# Altium PCB OLED.PcbDoc
Units mil, origin at the board's own origin, x right, y up, seen from the top; angles counter-clockwise.
Board outline 1061 x 1023 mil, 2 copper layers (Top Layer, Bottom Layer); 19 components, 14 nets, 71 pads, 11 vias.
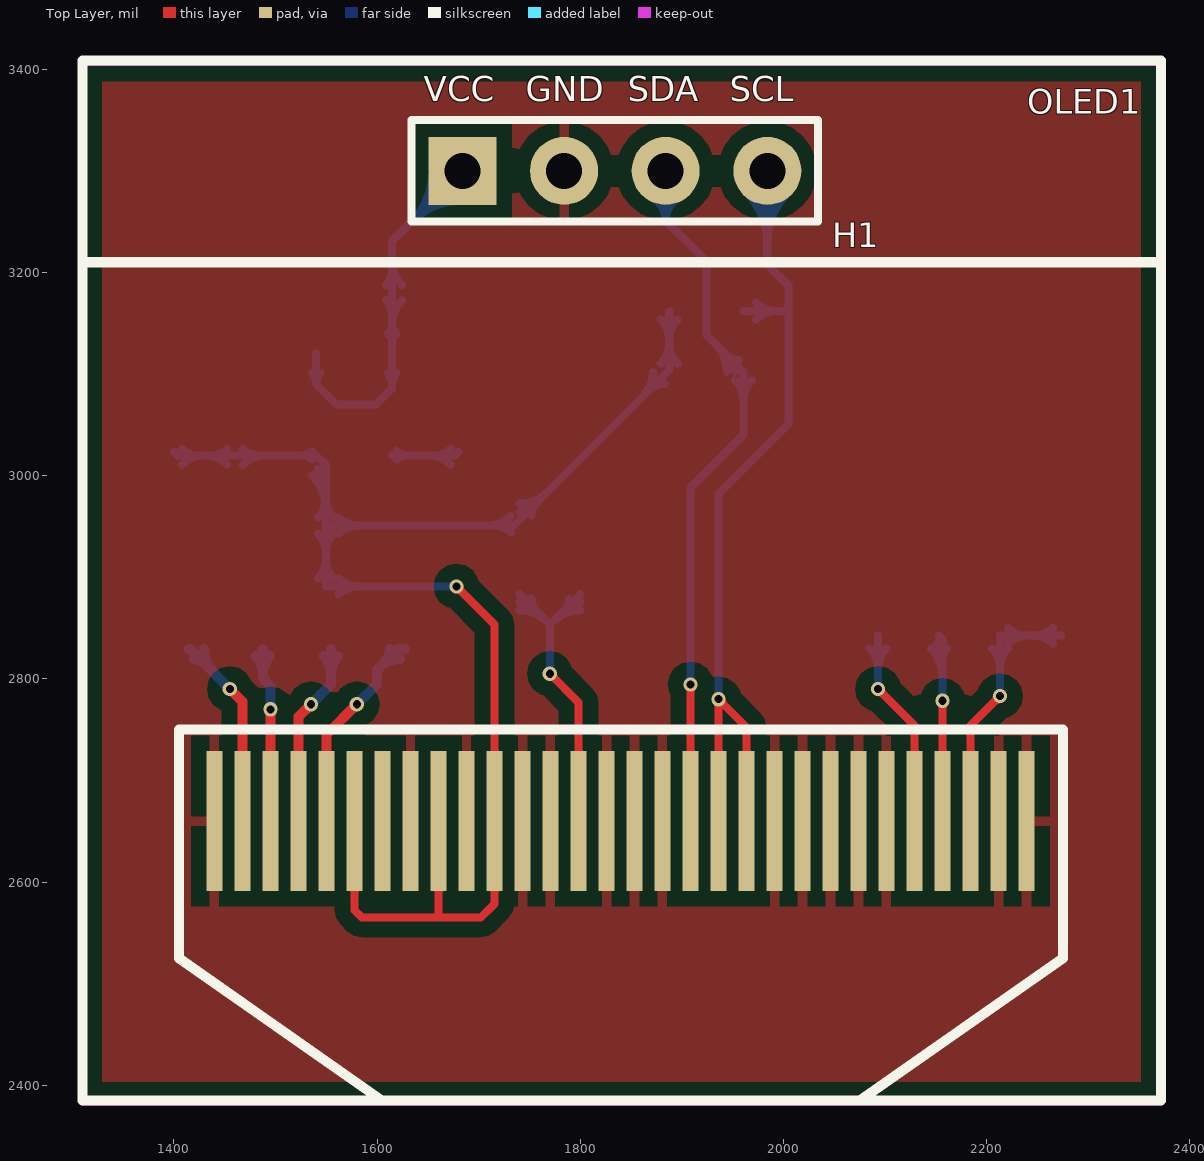
[diagram p0: Top Layer view]
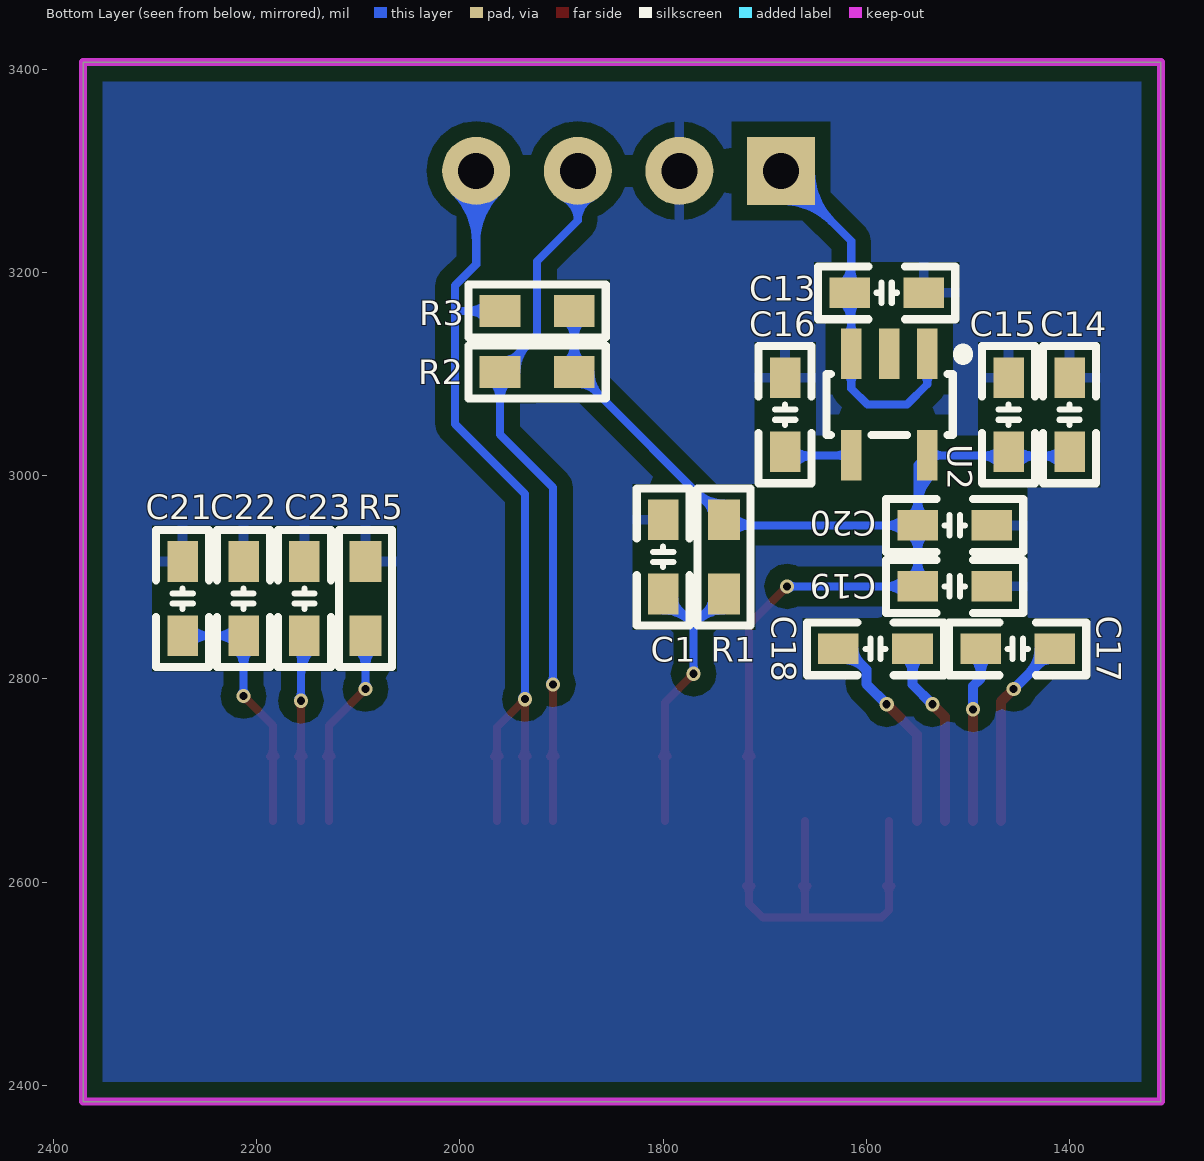
[diagram p1: Bottom Layer view, seen from below]

## Layer stack, top to bottom
Top Layer: signal copper 1.4
Dielectric: dielectric 12.6, FR-4, Dk 4.8
Bottom Layer: signal copper 1.4

## Board outline
1310,2384 1310,3407 2371,3407 2371,2384

## Design rules (kind name [scope] priority, off if disabled: settings)
Clearance [All] p1: gap=6
ComponentClearance [All] p1 off: gap=10 collisioncheckmode=3 verticalgap=10 showdistances=FALSE
HoleToHoleClearance [All] p1: gap=0 allowstackedmicrovias=TRUE
MinimumSolderMaskSliver [All] p1: minsoldermaskwidth=0
PolygonConnect [All] p1: connectstyle=Relief reliefconductorwidth=10 reliefentries=4 polygonreliefangle="90 Angle"
RoutingVias [All] p1: holewidth=8 width=14 viastyle="Through Hole" minholewidth=8 minwidth=14 maxholewidth=208 maxwidth=214
SilkToSilkClearance [All] p1: silktosilkclearance=0
SilkscreenOverComponentPads [All] p1: minsilkscreentomaskgap=0
SolderMaskExpansion [All] p1: expansion=4
TestPointUsage [All] p1: valid=0 allowmultiple=FALSE
Testpoint [All] p1: side=3 testpointundercomponent=TRUE minsize=40 maxsize=100 preferedsize=60 minholesize=0 maxholesize=40 preferedholesize=32 testpointgrid=1 style=297 order=0-112345678
Width [All] p1: maxlimit=200 minlimit=6 preferedwidth=10 toplayer_prefwidth=8 bottomlayer_prefwidth=8 minimp=50.000000 maximp=50.000000 favimp=50.000000
19 further rules are at their usual default settings.

## Components (designator, comment, footprint, x,y, rotation, side; value= is the part's Value field where it differs from the comment)
C1 "4.7uF" "C 0603_M" 1800,2920 r90 bottom
C13 "10uF" "C 0603_M" 1580,3180 r180 bottom
C14 "104" "C 0603_M" 1400,3060 r270 bottom
C15 "10uF" "C 0603_M" 1460,3060 r270 bottom
C16 "103" "C 0603_M" 1680,3060 r270 bottom
C17 "1uF" "C 0603_M" 1451,2829.5 r180 bottom
C18 "1uF" "C 0603_M" 1591,2829.5 r180 bottom
C19 "10uF" "C 0603_M" 1513,2891 r0 bottom
C20 "104" "C 0603_M" 1513,2951 r0 bottom
C21 "10uF" "C 0603_M" 2273,2879 r270 bottom
C22 "104" "C 0603_M" 2213,2879 r270 bottom
C23 "10uF" "C 0603_M" 2153,2879 r270 bottom
H1 "Header 4" HDR2.54-LI-4P 1834,3300 r0 top
OLED1 "OLED12864" OLED_0.96 1440,2660 r0 top locked
R1 "4.7K" "R 0603_M" 1740,2920 r90 bottom
R2 "4.7K" "R 0603_M" 1924,3102 r0 bottom
R3 "4.7K" "R 0603_M" 1924,3162 r0 bottom
R5 "760K" "R 0603_M" 2093,2879 r270 bottom
U2 "CAT6219-330TD" SOT-23-5 1540,3120 r270 bottom

## Footprints (in the part's own frame and the unit in brackets; to place one, negate y for a bottom-side part, rotate by r counter-clockwise, add the part's x,y. Pads: shape width x height; smd on the part's side, far side on the other; paste and mask are expansions set on the pad)
"C 0603_M" [mil] "无极性贴片电容"
  rect 40x30 smd: 1(-36.5,0) 2(36.5,0)
  silkscreen extent -68,-26 68,26, body extent -31,-16 31,16, height 32
HDR2.54-LI-4P [mm] "排针，4脚"
  rect 1.7x1.7 hole 0.9: 1(-3.81,0)
  round 1.7 hole 0.9: 2(-1.27,0) 3(1.27,0) 4(3.81,0)
  silkscreen extent -5.08,-1.27 5.08,1.27, body extent -5.08,-1.27 5.08,1.27, height 8.5
OLED_0.96 [mm]
  rect 0.4x3.5 smd: 1(0,0) 2(0.7,0) 3(1.4,0) 4(2.1,0) 5(2.8,0) 6(3.5,0) 7(4.2,0) 8(4.9,0) 9(5.6,0) 10(6.3,0) 11(7,0) 12(7.7,0) 13(8.4,0) 14(9.1,0) 15(9.8,0) 16(10.5,0) 17(11.2,0) 18(11.9,0) 19(12.6,0) 20(13.3,0) 21(14,0) 22(14.7,0) 23(15.4,0) 24(16.1,0) 25(16.8,0) 26(17.5,0) 27(18.2,0) 28(18.9,0) 29(19.6,0) 30(20.3,0)
  silkscreen extent -3.3,-6.98 23.66,19.01
"R 0603_M" [mil] "1/10W贴片电阻"
  rect 40x31.5 smd: 1(-36.5,0) 2(36.5,0)
  silkscreen extent -68,-26 68,26, body extent -31,-16 32,16, height 16
SOT-23-5 [mil]
  rect 50x20 smd: 1(0,0) 2(0,-37.4) 3(0,-74.8) 4(100,-74.8) 5(100,0)
  silkscreen extent 0,-99 80,35

## Part data
C1 C13 C14 C15 C16 C17 C18 C19 C20 C21 C22 C23: library part C
H1: "Header, 4-Pin"
R1 R2 R3 R5: library part R
U2: "3.3V 500mA LDO"

## Via types
v1: diameter 14, hole 8, Top Layer to Bottom Layer, 11 vias

## Nets (pads, with @x,y where several pads share a name; then routed paths per layer and width w, separated by ;. In a path a pad name is that pad's centre, name@x,y a point inside that pad or via, vN(x,y) a via of type N, cw(c..) or ccw(c..) an arc to the next point about the centre after c; other vN are vias at no path point)
GND: C1.2 C13.2 C14.1 C15.1 C16.1 C19.1 C20.1 C21.1 C22.1 C23.1 H1.2 OLED1.1 OLED1.8 OLED1.10 OLED1.12 OLED1.13 OLED1.15 OLED1.16 OLED1.17 OLED1.21 OLED1.22 OLED1.23 OLED1.24 OLED1.25 OLED1.29 OLED1.30 R5.1 U2.2
IIC_SCL: H1.3 OLED1.18 R2.2 | length 999.6
  Top Layer w8: OLED1.18@1905.76,2723.76 ccw(c1899.15,2730.38) 1908.5,2730.38 ccw(c1917.86,2730.38) OLED1.18@1911.24,2723.76 ; OLED1.18 v1(1908.5,2794.5) ; 1908.5,2787.26 ccw(c1901.26,2787.26) 1906.38,2792.38 cw(c1901.26,2787.26) 1908.5,2787.26 ; 1908.5,2787.26 cw(c1915.75,2787.26) 1910.63,2792.38 ccw(c1915.75,2787.26) 1908.5,2787.26
  Bottom Layer w8: H1.3@1870.19,3273.97 cw(c1857.99,3251) 1884,3251 ; H1.3@1873.94,3281.04 cw(c1865.05,3264.31) 1884,3264.31 cw(c1902.95,3264.31) H1.3@1894.06,3281.04 ; H1.3 1884,3251 ; H1.3@1897.81,3273.97 ccw(c1910.01,3251) 1884,3251 ; v1(1908.5,2794.5) 1908.5,2988.5 1960.5,3040.5 R2.2 1924,3138.5 1924,3211 1884,3251 ; 1933.19,3129.31 cw(c1905.87,3102) R2.2@1944.5,3102 ; 1943.45,3119.05 ccw(c1956.25,3131.84) R2.2@1956.25,3113.75 ; R2.2@1946.84,3115.66 cw(c1933.19,3102) R2.2@1952.5,3102 ; 1908.5,2801.75 ccw(c1915.75,2801.75) 1910.63,2796.63 cw(c1915.75,2801.75) 1908.5,2801.75 ; 1908.5,2801.75 cw(c1901.26,2801.75) 1906.38,2796.63 ccw(c1901.26,2801.75) 1908.5,2801.75 ; 1960.5,3073.64 ccw(c1932.14,3073.64) 1952.19,3093.69 cw(c1932.14,3073.64) 1960.5,3073.64 ; 1960.5,3073.64 cw(c1988.86,3073.64) 1968.81,3093.69 ccw(c1988.86,3073.64) 1960.5,3073.64
IIC_SDA: H1.4 OLED1.19 OLED1.20 R3.2 | length 1233
  Top Layer w8: OLED1.19@1933.32,2723.76 ccw(c1926.71,2730.38) 1936.06,2730.38 ccw(c1945.42,2730.38) OLED1.19@1938.8,2723.76 ; v1(1936,2780) v1@1936.06,2779.94 ; OLED1.19 v1@1936.06,2779.94 ; OLED1.20@1960.88,2723.76 ccw(c1954.27,2730.38) 1963.62,2730.38 ccw(c1972.97,2730.38) OLED1.20@1966.36,2723.76 ; OLED1.20 1963.62,2752.38 v1@1936.06,2779.94 ; 1941.12,2774.88 ccw(c1936,2769.76) 1936,2777 cw(c1936,2769.76) 1941.12,2774.88 ; 1941.12,2774.88 cw(c1946.24,2780) 1939,2780 ccw(c1946.24,2780) 1941.12,2774.88 ; v1@1933.88,2777.88 cw(c1928.61,2772.61) 1936.06,2772.61 ccw(c1928.61,2772.61) v1@1933.88,2777.88 ; 1936.06,2772.91 cw(c1943.09,2772.91) 1938.12,2777.88 ccw(c1943.09,2772.91) 1936.06,2772.91
  Bottom Layer w8: v1(1936,2780) 1936,2982 2005,3051 2005,3162 ; R3.2 2005,3162 ; H1.4@1963.17,3279.17 cw(c1912.87,3228.87) 1984,3228.87 cw(c2055.13,3228.87) H1.4@2004.83,3279.17 ; H1.4@1968.82,3284.82 cw(c1932.18,3248.18) 1984,3248.18 cw(c2035.82,3248.18) H1.4@1999.18,3284.82 ; H1.4 1984,3208 2005,3187 2005,3162 ; 1936,2787.24 ccw(c1943.24,2787.24) 1938.12,2782.12 cw(c1943.24,2787.24) 1936,2787.24 ; 1936,2787.24 cw(c1928.76,2787.24) 1933.88,2782.12 ccw(c1928.76,2787.24) 1936,2787.24 ; 1993.11,3162 ccw(c1993.11,3133.64) 1973.06,3153.69 cw(c1993.11,3133.64) 1993.11,3162 ; 1993.11,3162 cw(c1993.11,3190.36) 1973.06,3170.31 ccw(c1993.11,3190.36) 1993.11,3162
NetC16_2: C16.2 U2.4 | length 195.6
  Bottom Layer w8: U2.4 1676.5,3020 C16.2 ; 1629.29,3020 ccw(c1629.29,3005.51) 1619.05,3015.76 cw(c1629.29,3005.51) 1629.29,3020 ; 1629.29,3020 cw(c1629.29,3034.49) 1619.05,3024.24 ccw(c1629.29,3034.49) 1629.29,3020 ; 1649.82,3020 cw(c1649.82,2988.32) 1672.22,3010.72 ccw(c1649.82,2988.32) 1649.82,3020 ; 1657.07,3020 ccw(c1657.07,3041.43) 1672.22,3026.28 cw(c1657.07,3041.43) 1657.07,3020
NetC17_1: C17.1 OLED1.3 | length 248.5
  Top Layer w10: v1(1495,2770) 1495.12,2769.88 OLED1.3
  Bottom Layer w10: C17.1 1487.5,2800.5 1495,2793 v1(1495,2770) ; 1487.5,2805.36 ccw(c1463.36,2805.36) 1480.43,2822.43 cw(c1463.36,2805.36) 1487.5,2805.36 ; 1487.5,2805.36 cw(c1511.64,2805.36) 1494.57,2822.43 ccw(c1511.64,2805.36) 1487.5,2805.36
NetC17_2: C17.2 OLED1.2 | length 267.9
  Top Layer w10: v1(1455,2790) 1467.56,2777.44 OLED1.2
  Bottom Layer w10: C17.2 1415.5,2829.5 v1(1455,2790) ; C17.2@1419.5,2819.5 cw(c1419.5,2805.01) 1429.74,2815.26 ccw(c1419.5,2805.01) C17.2@1419.5,2819.5 ; C17.2@1429.5,2829.5 ccw(c1463.3,2829.5) 1439.4,2805.6 cw(c1463.3,2829.5) C17.2@1429.5,2829.5
NetC18_1: C18.1 OLED1.5 | length 243.5
  Top Layer w10: OLED1.5 1550.24,2745.24 v1(1580,2775)
  Bottom Layer w10: v1(1580,2775) 1600,2795 1600,2809 1620.5,2829.5 C18.1 ; 1602.01,2811.01 cw(c1622.5,2790.53) C18.1@1622.5,2819.5 ; 1606.84,2815.84 ccw(c1593.19,2829.5) C18.1@1612.5,2829.5
NetC18_2: C18.2 OLED1.4 | length 258.5
  Top Layer w10: OLED1.4 1522.68,2762.68 v1(1535,2775)
  Bottom Layer w10: v1(1535,2775) 1554.5,2794.5 C18.2 ; 1554.5,2805.36 ccw(c1530.36,2805.36) 1547.43,2822.43 cw(c1530.36,2805.36) 1554.5,2805.36 ; 1554.5,2805.36 cw(c1578.64,2805.36) 1561.57,2822.43 ccw(c1578.64,2805.36) 1554.5,2805.36
NetC21_2: C21.2 C22.2 OLED1.28 | length 565
  Top Layer w8: OLED1.28@2181.36,2723.76 ccw(c2174.74,2730.38) 2184.09,2730.38 ccw(c2193.45,2730.38) OLED1.28@2186.83,2723.76 ; OLED1.28 2184.09,2754.09 v1(2213,2783) ; 2207.88,2777.88 ccw(c2202.76,2783) 2210,2783 cw(c2202.76,2783) 2207.88,2777.88 ; 2207.88,2777.88 cw(c2213,2772.76) 2213,2780 ccw(c2213,2772.76) 2207.88,2777.88
  Bottom Layer w8: v1(2213,2783) C22.2 C21.2 ; 2213,2790.24 ccw(c2220.24,2790.24) 2215.12,2785.12 cw(c2220.24,2790.24) 2213,2790.24 ; 2213,2790.24 cw(c2205.76,2790.24) 2210.88,2785.12 ccw(c2205.76,2790.24) 2213,2790.24 ; 2213,2810.94 ccw(c2186.44,2810.94) 2205.22,2829.72 cw(c2186.44,2810.94) 2213,2810.94 ; 2213,2810.94 cw(c2239.56,2810.94) 2220.78,2829.72 ccw(c2239.56,2810.94) 2213,2810.94 ; 2239.56,2842.5 ccw(c2239.56,2815.94) 2220.78,2834.72 cw(c2239.56,2815.94) 2239.56,2842.5 ; 2239.56,2842.5 cw(c2239.56,2869.06) 2220.78,2850.28 ccw(c2239.56,2869.06) 2239.56,2842.5 ; 2246.44,2842.5 ccw(c2246.44,2869.06) 2265.22,2850.28 cw(c2246.44,2869.06) 2246.44,2842.5 ; 2246.44,2842.5 cw(c2246.44,2815.94) 2265.22,2834.72 ccw(c2246.44,2815.94) 2246.44,2842.5
NetC23_2: C23.2 OLED1.27 | length 301
  Top Layer w8: OLED1.27@2153.8,2723.76 ccw(c2147.18,2730.38) 2156.54,2730.38 ccw(c2165.89,2730.38) OLED1.27@2159.27,2723.76 ; OLED1.27 v1(2156.54,2778.46) ; 2156.54,2771.22 ccw(c2149.29,2771.22) 2154.41,2776.34 cw(c2149.29,2771.22) 2156.54,2771.22 ; 2156.54,2771.22 cw(c2163.78,2771.22) 2158.66,2776.34 ccw(c2163.78,2771.22) 2156.54,2771.22
  Bottom Layer w8: C23.2@2145.22,2829.72 cw(c2117.91,2802.41) 2156.54,2802.41 ; C23.2@2150.88,2835.38 cw(c2137.22,2821.72) 2156.54,2821.72 ; C23.2 2156.54,2838.96 v1(2156.54,2778.46) ; 2156.54,2819.48 cw(c2171.02,2819.48) C23.2@2160.78,2829.72 ; 2156.54,2785.71 ccw(c2163.78,2785.71) 2158.66,2780.59 cw(c2163.78,2785.71) 2156.54,2785.71 ; 2156.54,2785.71 cw(c2149.29,2785.71) 2154.41,2780.59 ccw(c2149.29,2785.71) 2156.54,2785.71
NetOLED1_26: OLED1.26 R5.2 | length 346.7
  Top Layer w8: v1(2093,2790) 2128.98,2754.02 OLED1.26 ; OLED1.26@2126.24,2723.76 ccw(c2119.62,2730.38) 2128.98,2730.38 ccw(c2138.33,2730.38) OLED1.26@2131.72,2723.76 ; 2098.12,2784.88 ccw(c2093,2779.76) 2093,2787 cw(c2093,2779.76) 2098.12,2784.88 ; 2098.12,2784.88 cw(c2103.24,2790) 2096,2790 ccw(c2103.24,2790) 2098.12,2784.88
  Bottom Layer w8: v1(2093,2790) R5.2 ; 2093,2797.24 ccw(c2100.24,2797.24) 2095.12,2792.12 cw(c2100.24,2797.24) 2093,2797.24 ; 2093,2797.24 cw(c2085.76,2797.24) 2090.88,2792.12 ccw(c2085.76,2797.24) 2093,2797.24 ; 2093,2809.89 ccw(c2064.64,2809.89) 2084.69,2829.94 cw(c2064.64,2809.89) 2093,2809.89 ; 2093,2809.89 cw(c2121.36,2809.89) 2101.31,2829.94 ccw(c2121.36,2809.89) 2093,2809.89
OLED_RST: C1.1 OLED1.14 R1.1 | length 466.9
  Top Layer w8: v1(1770,2805) 1798.27,2776.73 OLED1.14 ; OLED1.14@1795.53,2723.76 ccw(c1788.91,2730.38) 1798.27,2730.38 ccw(c1807.62,2730.38) OLED1.14@1801.01,2723.76 ; 1775.12,2799.88 ccw(c1770,2794.76) 1770,2802 cw(c1770,2794.76) 1775.12,2799.88 ; 1775.12,2799.88 cw(c1780.24,2805) 1773,2805 ccw(c1780.24,2805) 1775.12,2799.88
  Bottom Layer w8: R1.1@1740,2867.5 cw(c1740,2828.87) 1767.31,2856.19 ; R1.1@1740,2875.5 cw(c1740,2856.19) R1.1@1753.66,2869.84 ; R1.1 1770,2853.5 ; R1.1@1751.75,2879.25 ccw(c1769.84,2879.25) 1757.05,2866.45 ; v1(1770,2805) 1770,2853.5 ; 1772.69,2856.19 cw(c1800,2828.87) C1.1@1800,2867.5 ; 1784.76,2868.26 ccw(c1774.51,2878.5) C1.1@1789,2878.5 ; C1.1@1786.34,2869.84 cw(c1800,2856.19) C1.1@1800,2875.5 ; C1.1 1770,2853.5 ; 1770,2812.24 ccw(c1777.24,2812.24) 1772.12,2807.12 cw(c1777.24,2812.24) 1770,2812.24 ; 1770,2812.24 cw(c1762.76,2812.24) 1767.88,2807.12 ccw(c1762.76,2812.24) 1770,2812.24
VBAT: C13.1 H1.1 U2.1 U2.3 | length 859
  Bottom Layer w8: U2.1 1540,3090 1560,3070 1599,3070 1614.8,3085.8 U2.3 1614.8,3230.8 H1.1 ; H1.1@1654.54,3300 cw(c1583.4,3300) 1633.7,3249.7 cw(c1684,3199.4) H1.1@1684,3270.54 ; H1.1@1662.54,3300 cw(c1610.72,3300) 1647.36,3263.36 cw(c1684,3226.72) H1.1@1684,3278.54 ; 1540,3090.51 ccw(c1525.51,3090.51) 1535.76,3100.76 cw(c1525.51,3090.51) 1540,3090.51 ; 1540,3090.51 cw(c1554.49,3090.51) 1544.24,3100.76 ccw(c1554.49,3090.51) 1540,3090.51 ; 1614.8,3090.51 ccw(c1600.32,3090.51) 1610.56,3100.76 cw(c1600.32,3090.51) 1614.8,3090.51 ; 1614.8,3090.51 cw(c1629.29,3090.51) 1619.05,3100.76 ccw(c1629.29,3090.51) 1614.8,3090.51 ; 1614.8,3149.49 ccw(c1629.29,3149.49) 1619.05,3139.24 cw(c1629.29,3149.49) 1614.8,3149.49 ; 1614.8,3149.49 cw(c1600.32,3149.49) 1610.56,3139.24 ccw(c1600.32,3149.49) 1614.8,3149.49 ; C13.1@1608.72,3172.22 cw(c1594.04,3157.54) 1614.8,3157.54 ccw(c1594.04,3157.54) C13.1@1608.72,3172.22 ; C13.1@1608.72,3187.78 ccw(c1594.04,3202.46) 1614.8,3202.46 cw(c1594.04,3202.46) C13.1@1608.72,3187.78 ; 1614.8,3149.35 cw(c1647.15,3149.35) 1624.28,3172.22 ccw(c1647.15,3149.35) 1614.8,3149.35 ; 1614.8,3210.65 ccw(c1647.15,3210.65) 1624.28,3187.78 cw(c1647.15,3210.65) 1614.8,3210.65
VCC3.3: C14.2 C15.2 C19.2 C20.2 OLED1.6 OLED1.9 OLED1.11 R1.2 R2.1 R3.1 U2.5 | length 2825.5
  Top Layer w8: OLED1.6@1575.06,2596.24 cw(c1568.44,2589.62) 1577.8,2589.62 cw(c1587.15,2589.62) OLED1.6@1580.53,2596.24 ; OLED1.6 1577.8,2572.2 1585,2565 1660,2565 ; OLED1.9@1657.73,2596.24 cw(c1651.12,2589.62) 1660.47,2589.62 cw(c1669.83,2589.62) OLED1.9@1663.21,2596.24 ; OLED1.9 1660.47,2565.47 1660,2565 ; v1(1678,2891) 1715.59,2853.41 OLED1.11 1715.59,2578.59 1702,2565 1660,2565 ; OLED1.11@1712.85,2596.24 cw(c1706.24,2589.62) 1715.59,2589.62 cw(c1724.94,2589.62) OLED1.11@1718.33,2596.24 ; OLED1.11@1712.85,2723.76 ccw(c1706.24,2730.38) 1715.59,2730.38 ccw(c1724.94,2730.38) OLED1.11@1718.33,2723.76 ; 1683.12,2885.88 ccw(c1678,2880.76) 1678,2888 cw(c1678,2880.76) 1683.12,2885.88 ; 1683.12,2885.88 cw(c1688.24,2891) 1681,2891 ccw(c1688.24,2891) 1683.12,2885.88
  Bottom Layer w8: C14.2 1403.5,3020 U2.5 1549.5,3010.5 C20.2 ; v1(1678,2891) C19.2 C20.2 ; R1.2@1740,2964.5 ccw(c1740,2983.81) R1.2@1753.66,2970.16 ; R1.2@1740,2972.5 ccw(c1740,3011.13) 1767.31,2983.81 ; R1.2@1751.75,2960.75 cw(c1769.84,2960.75) 1757.05,2973.55 ; 1861.6,3078.1 ccw(c1837.7,3102) R2.1@1871.5,3102 ; 1867.04,3083.54 cw(c1883.25,3067.33) R2.1@1883.25,3090.25 ; R3.1 1887.5,3104 1734.5,2951 C20.2 ; 1525.51,3020 ccw(c1525.51,3034.49) 1535.76,3024.24 cw(c1525.51,3034.49) 1525.51,3020 ; 1525.51,3020 cw(c1525.51,3005.51) 1535.76,3015.76 ccw(c1525.51,3005.51) 1525.51,3020 ; 1549.5,2917.56 ccw(c1576.06,2917.56) 1557.28,2898.78 cw(c1576.06,2917.56) 1549.5,2917.56 ; 1549.5,2917.56 cw(c1522.94,2917.56) 1541.72,2898.78 ccw(c1522.94,2917.56) 1549.5,2917.56 ; 1549.5,2924.44 ccw(c1522.94,2924.44) 1541.72,2943.22 cw(c1522.94,2924.44) 1549.5,2924.44 ; 1549.5,2924.44 cw(c1576.06,2924.44) 1557.28,2943.22 ccw(c1576.06,2924.44) 1549.5,2924.44 ; 1549.5,2977.56 ccw(c1576.06,2977.56) 1557.28,2958.78 cw(c1576.06,2977.56) 1549.5,2977.56 ; 1549.5,2977.56 cw(c1522.94,2977.56) 1541.72,2958.78 ccw(c1522.94,2977.56) 1549.5,2977.56 ; 1581.06,2891 ccw(c1581.06,2864.44) 1562.28,2883.22 cw(c1581.06,2864.44) 1581.06,2891 ; 1581.06,2891 cw(c1581.06,2917.56) 1562.28,2898.78 ccw(c1581.06,2917.56) 1581.06,2891 ; 1581.06,2951 ccw(c1581.06,2924.44) 1562.28,2943.22 cw(c1581.06,2924.44) 1581.06,2951 ; 1581.06,2951 cw(c1581.06,2977.56) 1562.28,2958.78 ccw(c1581.06,2977.56) 1581.06,2951 ; 1670.76,2891 ccw(c1670.76,2898.24) 1675.88,2893.12 cw(c1670.76,2898.24) 1670.76,2891 ; 1670.76,2891 cw(c1670.76,2883.76) 1675.88,2888.88 ccw(c1670.76,2883.76) 1670.76,2891 ; 1887.5,3130.36 ccw(c1915.86,3130.36) 1895.81,3110.31 cw(c1915.86,3130.36) 1887.5,3130.36 ; 1887.5,3130.36 cw(c1859.14,3130.36) 1879.19,3110.31 ccw(c1859.14,3130.36) 1887.5,3130.36 ; 1887.5,3133.64 ccw(c1859.14,3133.64) 1879.19,3153.69 cw(c1859.14,3133.64) 1887.5,3133.64 ; 1887.5,3133.64 cw(c1915.86,3133.64) 1895.81,3153.69 ccw(c1915.86,3133.64) 1887.5,3133.64 ; C14.2@1407.78,3010.72 cw(c1430.18,2988.32) 1430.18,3020 ccw(c1430.18,2988.32) C14.2@1407.78,3010.72 ; C14.2@1407.78,3026.28 ccw(c1422.93,3041.43) 1422.93,3020 cw(c1422.93,3041.43) C14.2@1407.78,3026.28 ; 1429.82,3020 cw(c1429.82,2988.32) 1452.22,3010.72 ccw(c1429.82,2988.32) 1429.82,3020 ; 1437.07,3020 ccw(c1437.07,3041.43) 1452.22,3026.28 cw(c1437.07,3041.43) 1437.07,3020 ; C15.2@1467.78,3010.72 cw(c1490.18,2988.32) 1490.18,3020 ccw(c1490.18,2988.32) C15.2@1467.78,3010.72 ; C15.2@1467.78,3026.28 ccw(c1482.93,3041.43) 1482.93,3020 cw(c1482.93,3041.43) C15.2@1467.78,3026.28 ; U2.5@1535.76,3000.76 cw(c1502.58,2967.58) 1549.5,2967.58 ccw(c1502.58,2967.58) U2.5@1535.76,3000.76 ; U2.5@1541.41,3006.41 cw(c1521.89,2986.89) 1549.5,2986.89 ccw(c1521.89,2986.89) U2.5@1541.41,3006.41 ; 1708.62,2951 ccw(c1708.62,2983.62) 1731.69,2960.56 cw(c1708.62,2983.62) 1708.62,2951 ; 1714.65,2951 cw(c1714.65,2926.9) 1731.69,2943.94 ccw(c1714.65,2926.9) 1714.65,2951
pads on no net: OLED1.7

## Polygon pours and split planes (outlines as drawn)
GND on Top Layer "Top Layer-No Net" (solid, remove dead copper, pour order 1000): 1310,3407 1310,2384 2371,2384 2371,3407
GND on Bottom Layer "Top Layer-No Net" (solid, remove dead copper, pour order 1001): 1310,3407 1310,2384 2371,2384 2371,3407

## Keep-outs
Keep-Out Layer:
  lines w8: 1310,2384 2371,2384 2371,3407 2105.75,3407 1575.25,3407 1310,3407 1310,2384

## Silkscreen, mask and mechanical layers (free items; w line width, h text height)
Top Overlay:
  text "VCC" at 1646,3360 h42
  text "GND" at 1746.31,3360 h42
  text "SDA" at 1846.65,3360 h42
  text "SCL" at 1947,3360 h42
Top Solder:
  drawing of 1791 lines, arcs and shapes, not listed
Bottom Solder:
  text "OLED V1.0" at 2306,3364 h80 r90
  text "Lovelessing..." at 2320,2472 h180

## Dimensions
1310,3407 to 2371,3407 on Top Overlay
1310,2384 to 1575.25,3407 on Top Overlay